# EAGLE board LTC3092_BREAKOUT (EAGLE 7.2.0)
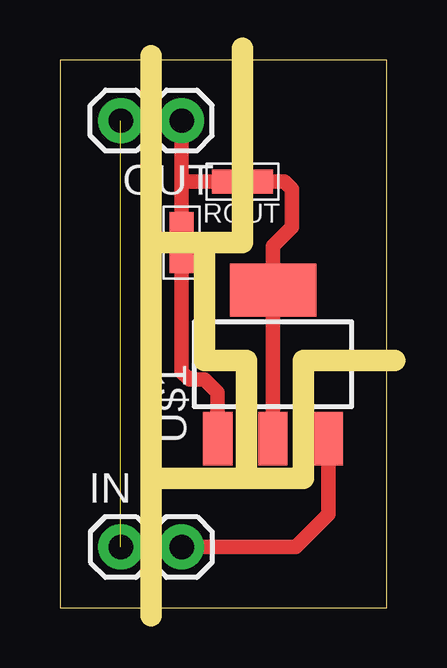
[diagram p0: board, top side]

Size 13.64 x 22.85 mm. Coordinates in mm from the lower left corner, seen from the top.
Outline: 0,0 13.64,0 13.64,22.85 0,22.85 0,0
Copper layers (1*16): Top 0.035mm / dielectric 1.5mm / Bottom 0.035mm
Design rules "default": minimum track width 10mil, minimum drill 24mil, track to track 8mil, track to pad 8mil, pad to pad 8mil, via to via 8mil, smd to smd 8mil, copper to edge 40mil, drill to drill 8mil, minimum pad ring 10mil, minimum via ring 8mil, stop-mask expansion 4mil, vias tented up to drill 0mil, thermal gap 10mil
Milling: 13 lines

## Footprints (pad centres in the part's own frame; a part is rotated, then mirrored left to right if it is on the bottom)
1X02 = drill 1.016 pad 1.88: 1 0,0; 2 2.54,0
R0603-N = smd 0.95 x 1: 1 -0.8,0; 2 0.8,0
SOT223 = smd 1.219 x 2.235: 1 -2.311,-3.099; 2 0,-3.099; 3 2.311,-3.099 | smd 3.6 x 2.2: 4 0,3.099

## Placement (x,y rotation side)
IN  [1X02]  2.54,2.54 0 top
OUT  [1X02]  5.08,20.32 180 top
ROUT  1ohm  [R0603-N]  7.62,17.78 180 top
RSET  20k  [R0603-N]  5.08,15.24 90 top
U$1  LT3092  [SOT223]  8.89,10.16 0 top

## Library data of the parts
IN OUT = SparkFun-Connectors
ROUT RSET = passives-7351
U$1 = _my-parts

## Nets
GND: IN.1 OUT.2
N$1: IN.2 U$1.3
N$3: RSET.1 U$1.1
N$4: OUT.1 ROUT.2 RSET.2
N$5: ROUT.1 U$1.2 U$1.4

## Tracks (layer width: path | path; a pad name or v marks a point on that pad's centre or on a via)
GND  (1 unrouted)
N$1
  Top 0.61: U$1.3 11.2,3.9 9.84,2.54 IN.2
N$3
  Top 0.61: U$1.1 6.58,8.98 6.03,9.53 5.4,9.53 5.08,9.84 RSET.1
N$4
  Top 0.61: OUT.1 5.08,17.78 | 5.08,17.78 RSET.2 | ROUT.2 5.08,17.78
N$5
  Top 0.61: U$1.2 U$1.4 8.89,15.08 9.68,15.88 9.68,17.46 9.37,17.78 ROUT.1